# Altium PCB power.PcbDoc (part 1 of 2)
Units mm, origin at the board's own origin, x right, y up, seen from the top; angles counter-clockwise.
Board outline 100 x 100 mm, 2 copper layers (Top Layer, Bottom Layer); 57 components, 26 nets, 166 pads, 23 vias.
Unrouted connection lines stored in the file: 41.
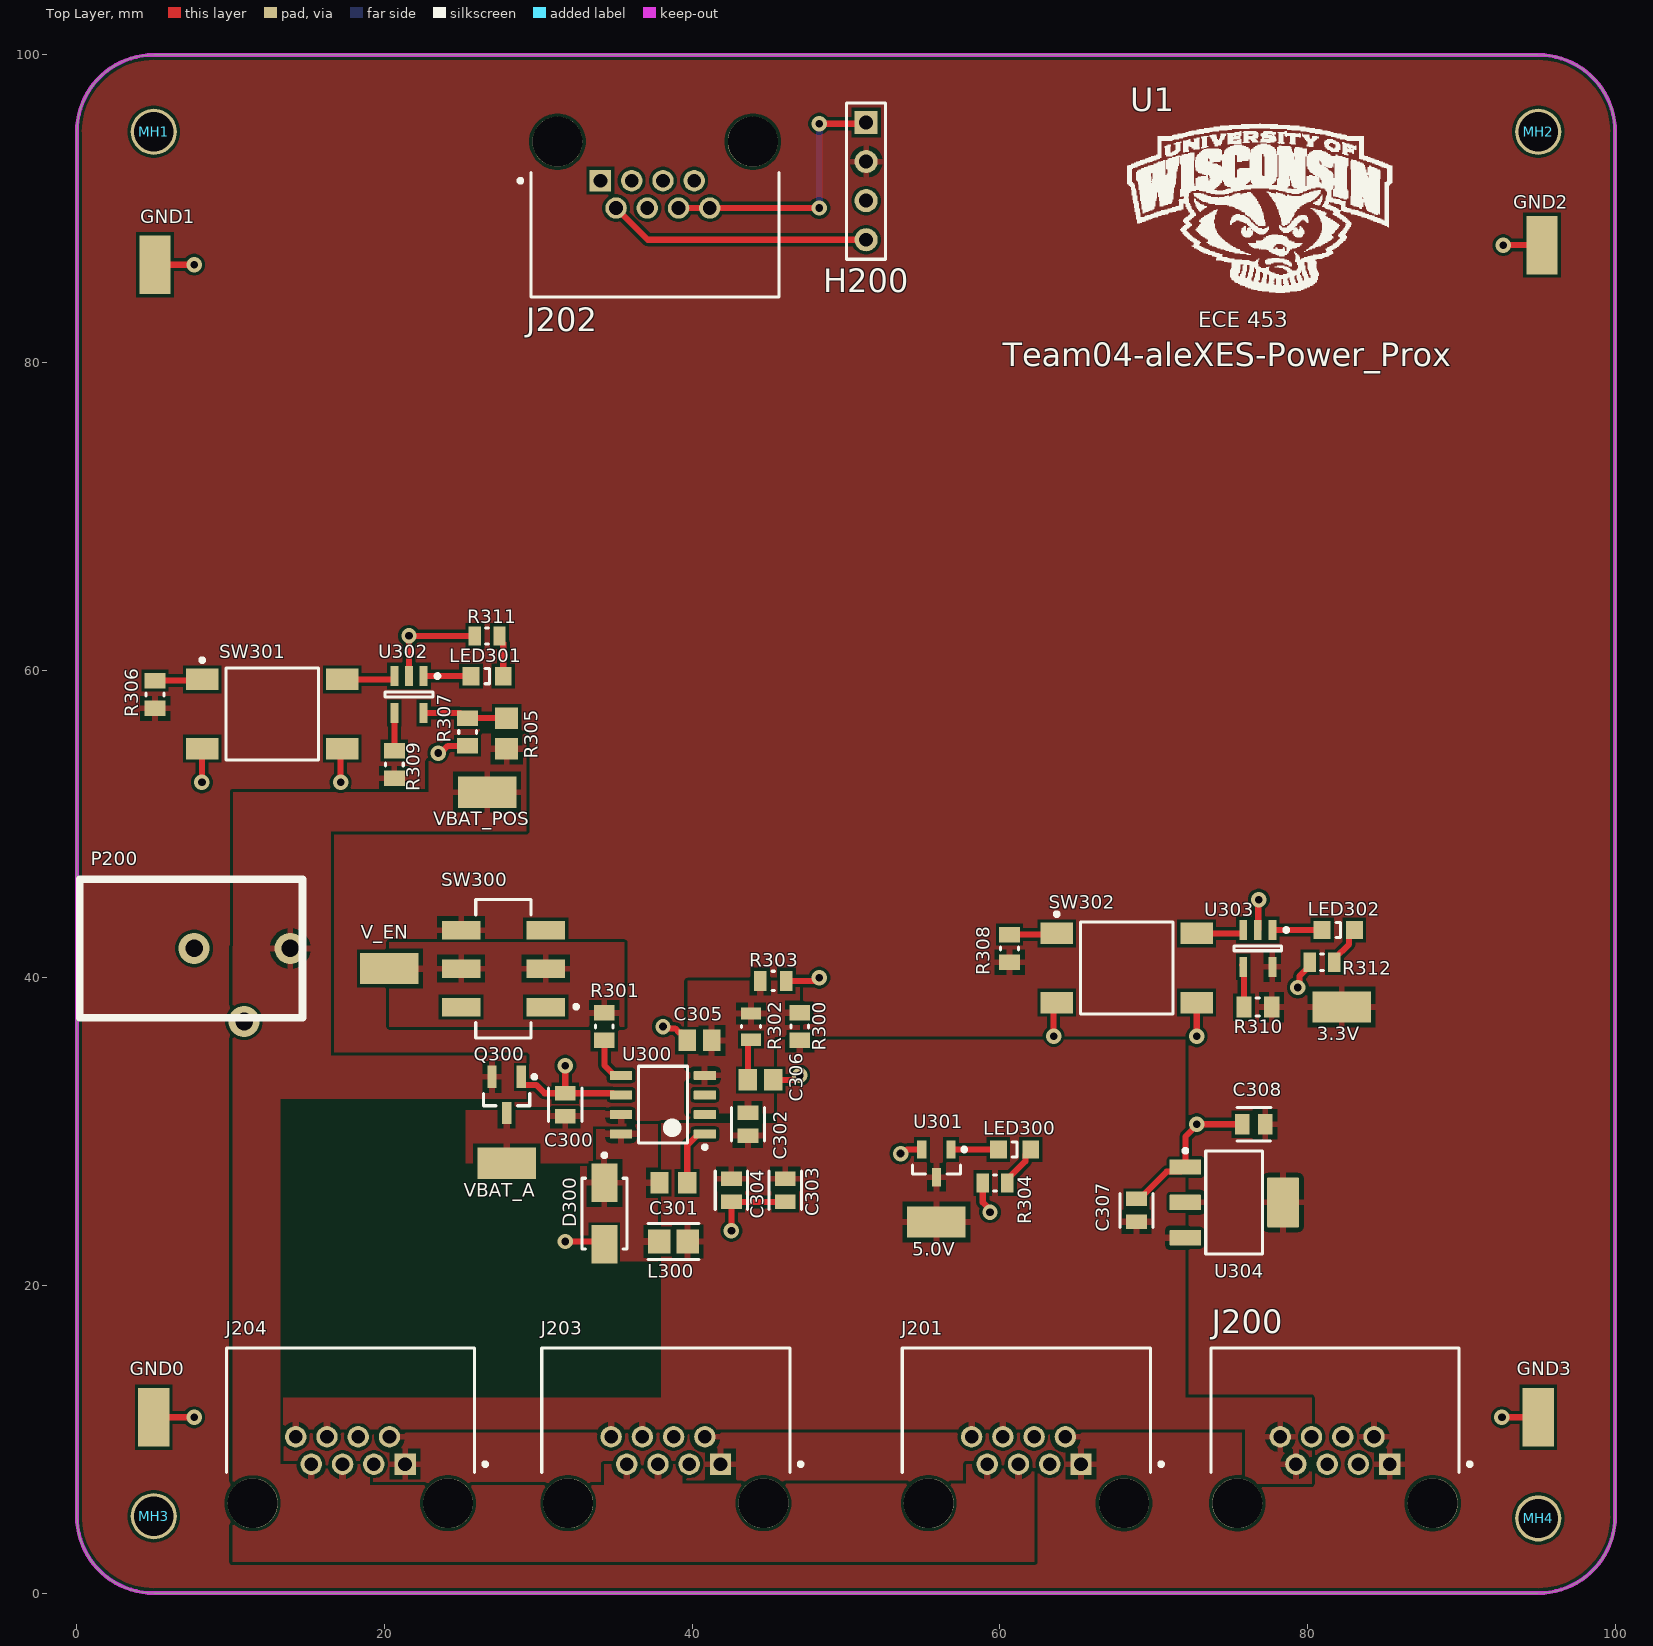
[diagram p0: Top Layer view]
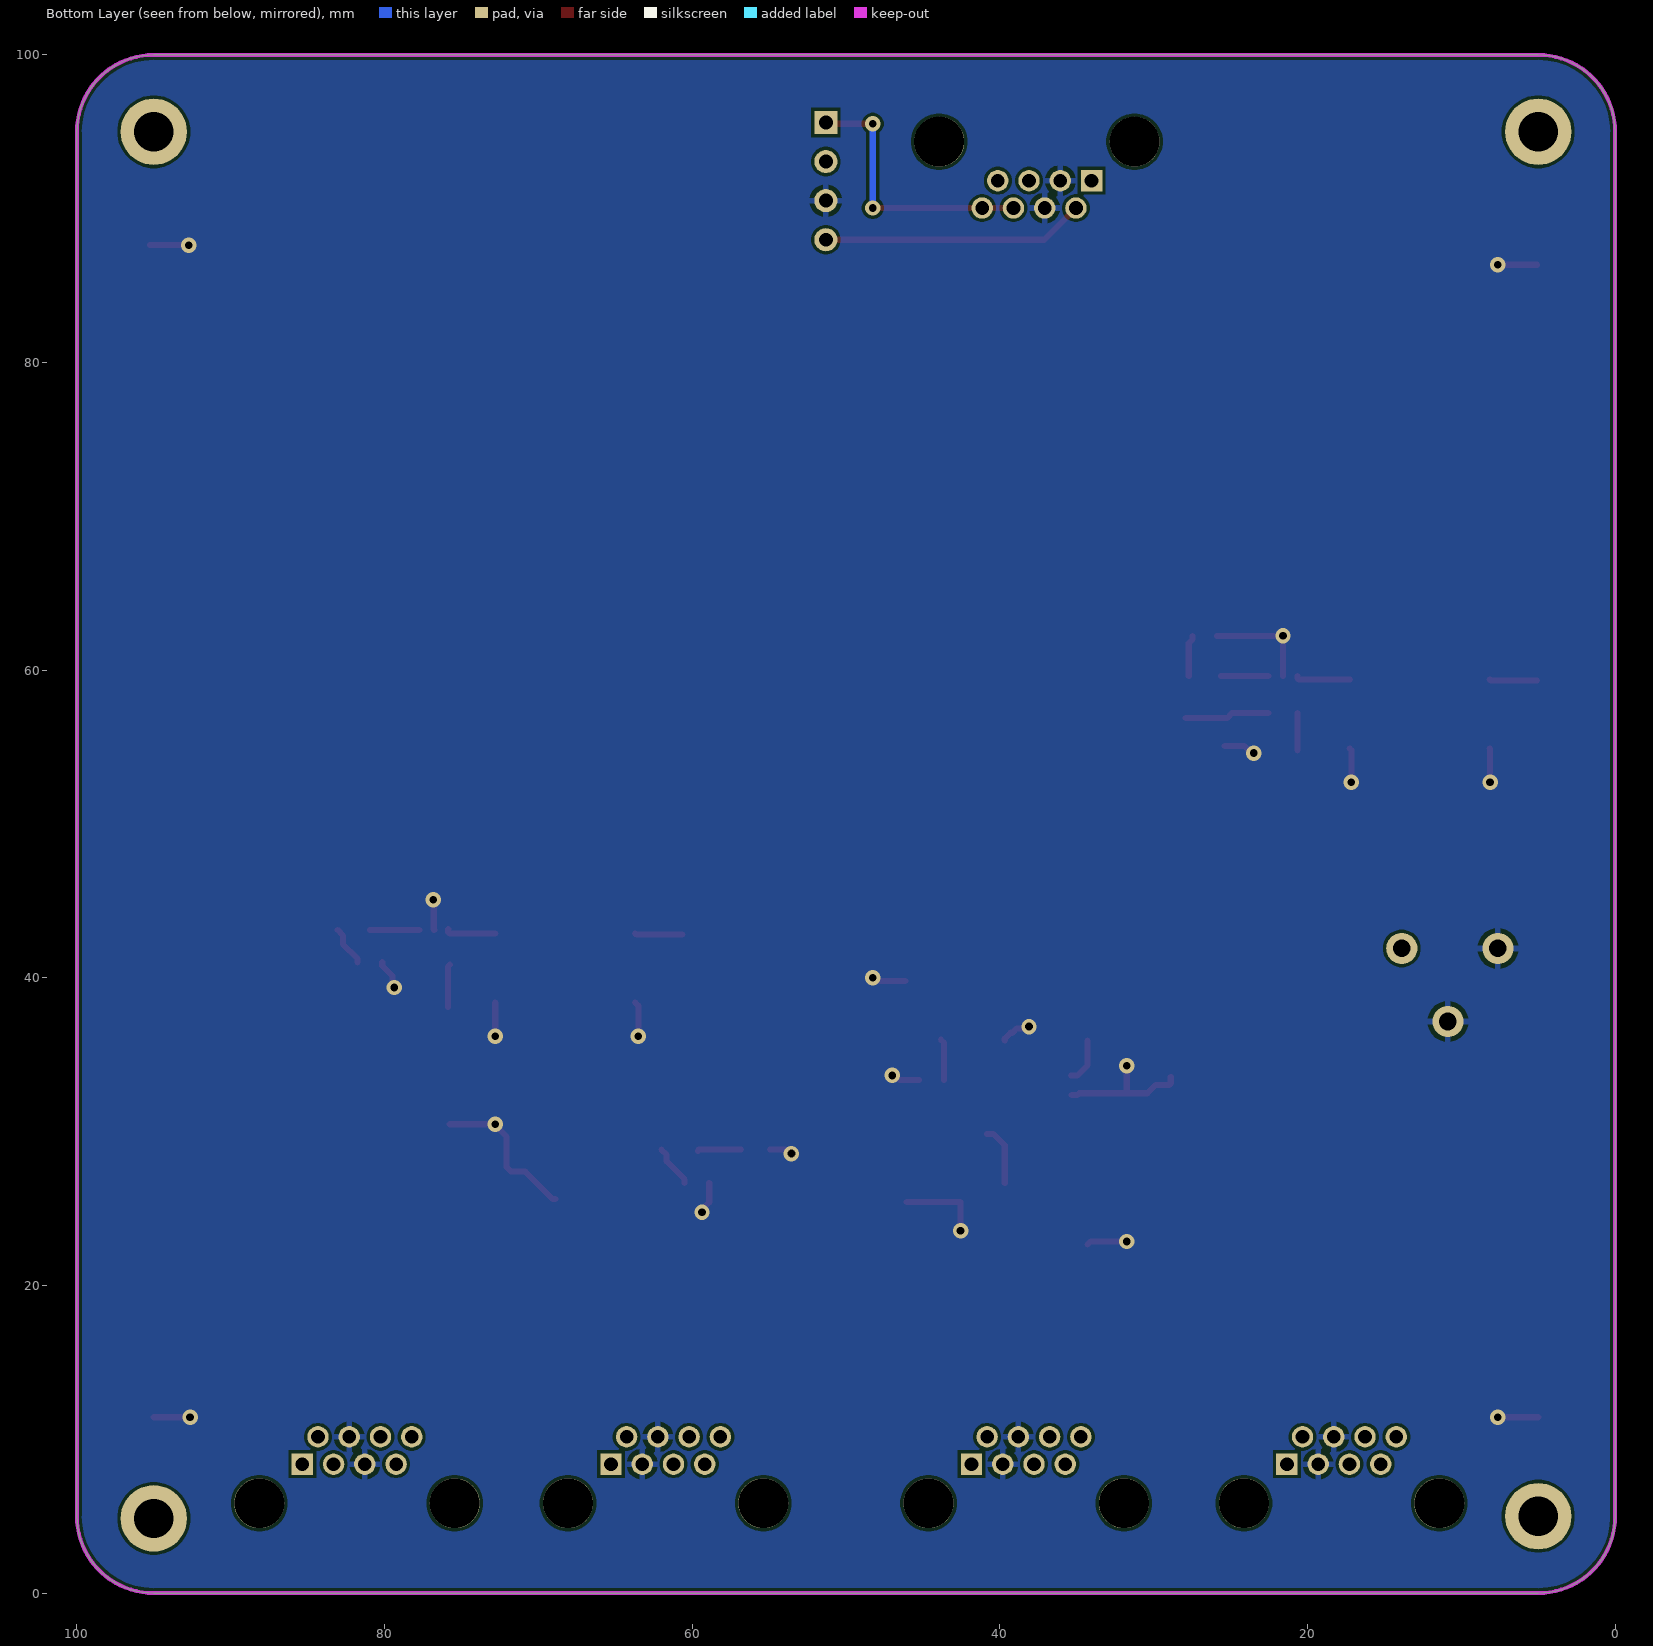
[diagram p1: Bottom Layer view, seen from below]
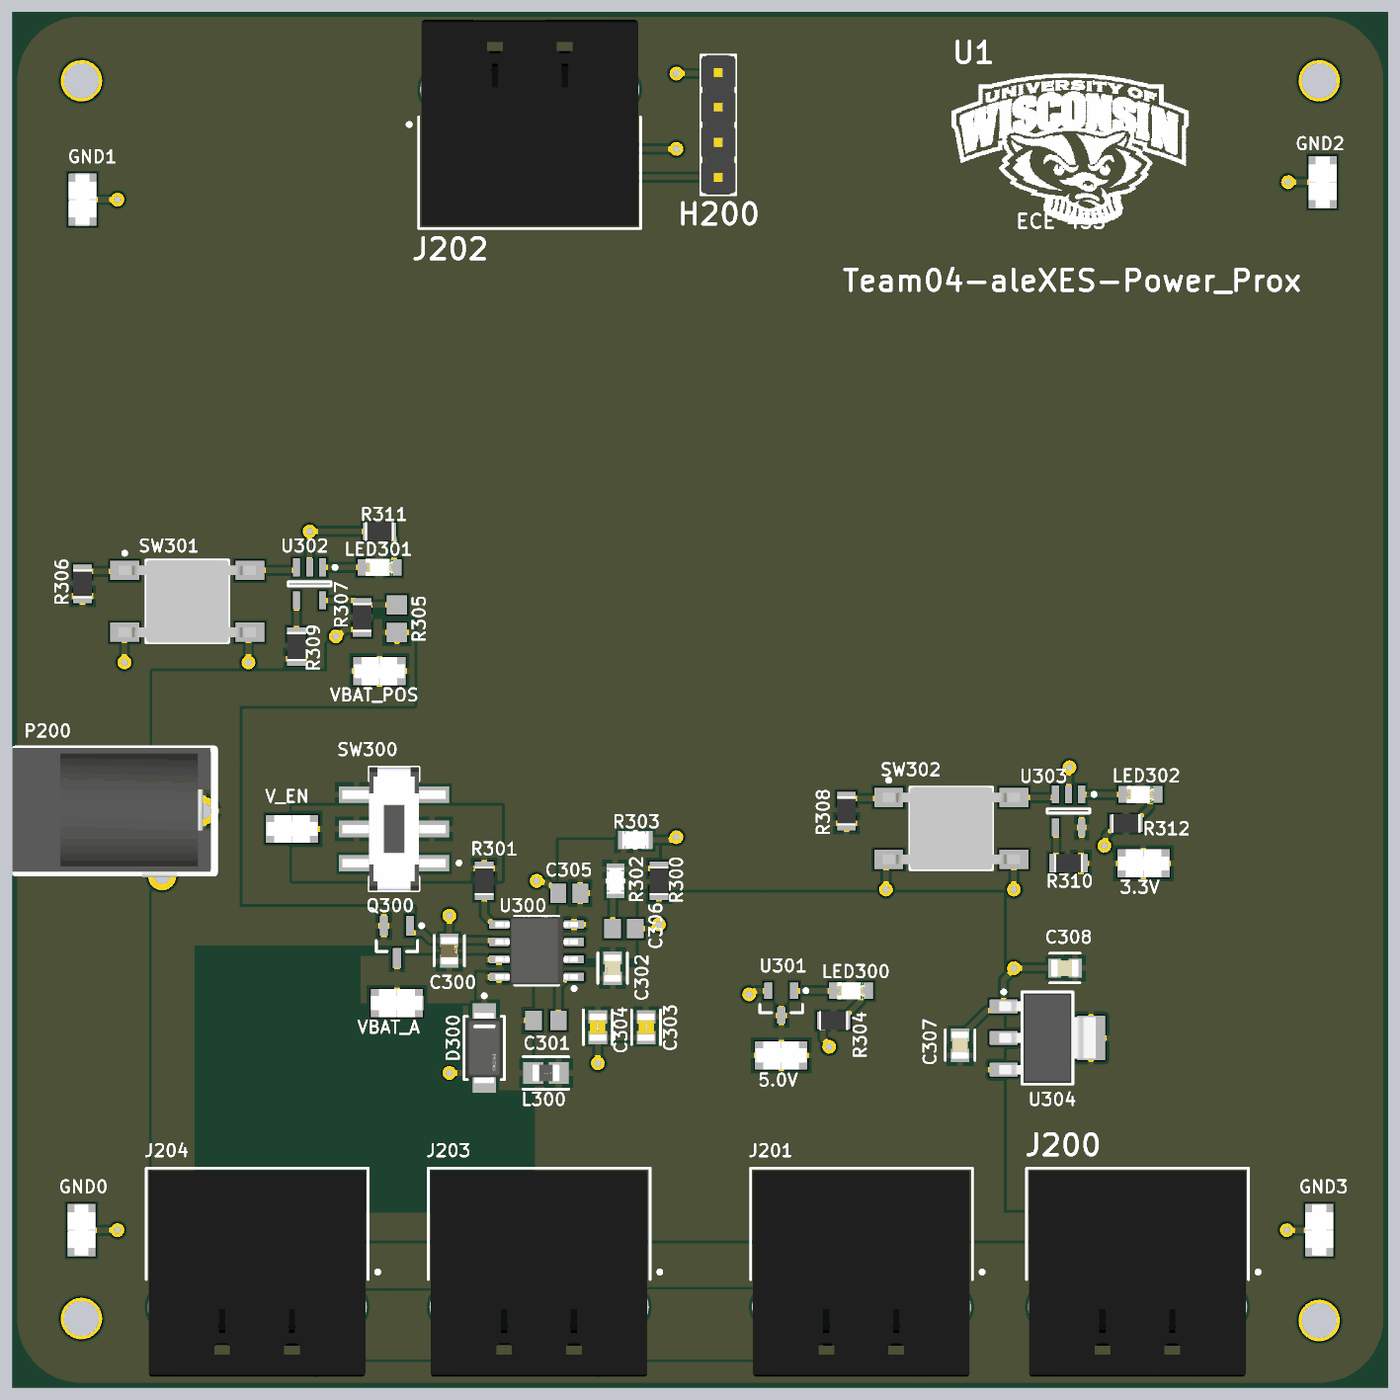
[diagram p2: 3D render of the assembled board from above, using the file's embedded part models]

## Layer stack, top to bottom
Top Solder: solder mask 0.0102, Solder Resist, Dk 3.5
Top Layer: signal copper 0.0356
Dielectric1: dielectric 0.32, FR-4, Dk 4.8
Bottom Layer: signal copper 0.0356
Bottom Solder: solder mask 0.0102, Solder Resist, Dk 3.5

## Board outline
0,5 ccw(c5,5) 5,0 95,0 ccw(c95,5) 100,5 100,95 ccw(c95,95) 95,100 5,100 ccw(c5,95) 0,95

## Design rules (kind name [scope] priority, off if disabled: settings)
Clearance Polygon_Clearance [All vs InPolygon] p1: gap=0.2 ignorepadtopadclearanceinfootprint=FALSE
Clearance [All] p2: gap=0.2 ignorepadtopadclearanceinfootprint=TRUE
ComponentClearance [InComponent('U3')] p1: gap=0 collisioncheckmode=3 verticalgap=0.254 showdistances=FALSE
Height [All] p1: minheight=0 maxheight=75 prefheight=12.7
HoleSize [All] p1: absolutevalues=TRUE maxlimit=6.35 minlimit=0.3 maxpercent=80.000 minpercent=20.000
MinimumAnnularRing [All] p1: minimumring=0.15
MinimumSolderMaskSliver [All] p1: minsoldermaskwidth=0.22
NetAntennae NetAntennae_5.0V [InNet('5.0V')] p1: netantennaetolerance=0
NetAntennae NetAntennae_3.3V [InNet('3.3V')] p2: netantennaetolerance=0
PlaneClearance [All] p1: clearance=0.3
PlaneConnect [All] p1: planeconnectstyle=Relief reliefexpansion=0.3 reliefentries=4 reliefconductorwidth=0.3 reliefairgap=0.3
PolygonConnect ViaConnect [All vs IsVia] p1: connectstyle=Direct reliefconductorwidth=0.381 reliefentries=4 polygonreliefangle="90 Angle" airgapwidth=0.254
PolygonConnect [All] p2: connectstyle=Relief reliefconductorwidth=0.4 reliefentries=4 polygonreliefangle="90 Angle" airgapwidth=0.3
RoutingVias [All] p1: holewidth=0.3 width=0.6 viastyle="Through Hole" minholewidth=0.3 minwidth=0.6 maxholewidth=5 maxwidth=10
SilkToSilkClearance [All] p1: silktosilkclearance=0
SilkToSolderMaskClearance [IsPad] p1: minsilkscreentomaskgap=0 clearancetoexposedcopper=TRUE
SolderMaskExpansion [All] p1: expansion=0.102 istentingtop=FALSE
UnConnectedPin [All] p1:
Width [All] p1: maxlimit=10 minlimit=0.2 preferedwidth=0.6
21 further rules are at their usual default settings.

## Classes and differential pairs
component class 04_Mechanical: MH1 MH2 MH3 MH4 U1

## Components (designator, comment, footprint, x,y, rotation, side; value= is the part's Value field where it differs from the comment)
3.3V "5019" KSTN-5019_V 82.22,38.1 r180 top
5.0V "5019" KSTN-5019_V 55.88,24.13 r180 top
C300 "C0805C475K3PACTU" FP-C0805C475K3PACTU-MFG 31.75,31.75 r90 top value=4.7uF
C301 "10nF" CAP_0805 38.775,26.67 r180 top
C302 "C0805C272K5RACTU" FP-C0805C-DN-MFG 43.625,30.48 r90 top value="2,700 pF"
C303 "C0805C476M9PACTU" FP-C0805C476M9PACTU-MFG 46.055,26.182 r270 top value=47uF
C304 "C0805C476M9PACTU" FP-C0805C476M9PACTU-MFG 42.55,26.182 r270 top value=47uF
C305 "C0805C151J1GACTU" CAPC2013X88X50NL20T25 40.475,35.93 r0 top value=150pF
C306 "08055C563KAT2A" CAPC2013X94X50NL20T25 44.45,33.36 r180 top value=56nF
C307 "C0805C106K8PACTU" FP-C0805C-DG-MFG 68.885,24.88 r90 top value=10uF
C308 "C0805C106K8PACTU" FP-C0805C-DG-MFG 76.505,30.48 r180 top value=10uF
D300 "B340A-13-F" FP-SMA-MFG 34.29,24.67 r270 top
GND0 "5019" KSTN-5019_V 5,11.43 r90 top
GND1 "5019" KSTN-5019_V 5.08,86.36 r90 top
GND2 "5019" KSTN-5019_V 95.25,87.63 r90 top
GND3 "5019" KSTN-5019_V 95,11.43 r90 top
H200 "4-Pin" 4X1HDR 51.308,91.793 r270 top value=4P-Header
J200 "RJHSE-5080" FP-RJHSE-5080-MFG 81.788,8.255 r0 top
J201 "RJHSE-5080" FP-RJHSE-5080-MFG 61.722,8.255 r0 top
J202 "RJHSE-5080" FP-RJHSE-5080-MFG 37.592,91.948 r180 top
J203 "RJHSE-5080" FP-RJHSE-5080-MFG 38.285,8.255 r0 top
J204 "RJHSE-5080" FP-RJHSE-5080-MFG 17.78,8.255 r0 top
L300 "LB2012T680K" FP-LB2012-1_25-0_2-IPC_A 38.775,22.86 r0 top
LED300 "150080GS75000" 0805_A 60.96,28.84 r180 top
LED301 "150080GS75000" 0805_A 26.67,59.62 r180 top
LED302 "150080GS75000" 0805_A 82,43.11 r180 top
MH1 "MHOLE_2_55MM" MHOLE_2_55MM 5,95 r0 top locked
MH2 "MHOLE_2_55MM" MHOLE_2_55MM 95,95 r0 top locked
MH3 "MHOLE_2_55MM" MHOLE_2_55MM 5,5 r0 top locked
MH4 "MHOLE_2_55MM" MHOLE_2_55MM 95,4.858 r0 top locked
P200 "PJ-102" PJ-102 13.87,41.91 r90 top value=CP-102AD
Q300 "SSM3J328R,LF" SOT-23_M 27.94,32.385 r270 top
R300 "RC0805FR-0710KL" RESC2013X60X35NL10T20 46.99,36.83 r90 top value=10kR
R301 "RC0805FR-0710KL" RESC2013X60X35NL10T20 34.29,36.83 r270 top value=10kR
R302 "CRCW08051K78FKEA" FP-CRCW0805-e3-IPC_C 43.825,36.83 r90 top value=1.78kR
R303 "CRCW08053K24FKEA" FP-CRCW0805-e3-IPC_C 45.275,39.8 r180 top value=3.24kR
R304 "RC0805FR-07330RL" RESC2013X60X35LL10T20 59.69,26.67 r0 top value=330R
R305 "30K" RES_0805 27.94,55.88 r270 top
R306 "RC0805FR-0710KL" RESC2013X60X35NL10T20 5.08,58.42 r270 top value=10kR
R307 "RC0805FR-0710KL" RESC2013X60X35NL10T20 25.4,55.98 r90 top value=10kR
R308 "RC0805FR-0710KL" RESC2013X60X35NL10T20 60.63,41.91 r270 top value=10kR
R309 "RC0805FR-0710KL" RESC2013X60X35NL10T20 20.64,53.87 r90 top value=10kR
R310 "RC0805FR-0710KL" RESC2013X60X35NL10T20 76.77,38.1 r180 top value=10kR
R311 "RC0805FR-07330RL" RESC2013X60X35LL10T20 26.67,62.23 r0 top value=330R
R312 "RC0805FR-07330RL" RESC2013X60X35LL10T20 80.95,41.01 r0 top value=330R
SW300 "JS202011SCQN" C&K_COMPONENTS_0_MFG 27.73,40.6 r90 top
SW301 "FSM4JSMA" TECO-FSM4JSMA_V 12.7,57.15 r90 top
SW302 "FSM4JSMA" TECO-FSM4JSMA_V 68.25,40.64 r90 top
U1 "Bucky" WALKINGBUCKY 75.692,82.804 r0 top
U300 "TPS5410D" D0008A_N 38.1,31.75 r180 top
U301 "MCP112T-475E/TT" SOT-23-TT3_L 55.88,27.94 r270 top
U302 "MCP1316T-29LE/OT" SOT-23-OT5_M 21.59,58.42 r270 top
U303 "MCP1316T-29LE/OT" SOT-23-OT5_M 76.77,41.91 r270 top
U304 "TLV1117LV33DCYT" DCY0004A_M 75.235,25.4 r0 top
V_EN "5019" KSTN-5019_V 20.32,40.6 r0 top
VBAT_A "5019" KSTN-5019_V 27.94,27.94 r180 top
VBAT_POS "5019" KSTN-5019_V 26.67,52.07 r180 top

## Footprints (in the part's own frame and the unit in brackets; to place one, negate y for a bottom-side part, rotate by r counter-clockwise, add the part's x,y. Pads: shape width x height; smd on the part's side, far side on the other; paste and mask are expansions set on the pad)
4X1HDR [mm]
  rect 1.5x1.5 hole 0.9: 1(-3.81,0)
  round 1.5 hole 0.9: 2(-1.27,0) 3(1.27,0) 4(3.81,0)
  silkscreen extent -5.08,-1.27 5.08,1.27, body extent -5.08,-1.27 5.08,1.27, height 8.55
0805_A [mm]
  rect 1.1x1.2 smd: 1(-1.05,0) 2(1.05,0)
  silkscreen extent -0.15,-0.5 0.15,0.5, body extent -1,-0.62 1,0.63, height 0.68
C&K_COMPONENTS_0_MFG [mm]
  rect 1.2x2.5 smd paste+0 mask+0: 1(-2.5,-2.75) 2(0,-2.75) 3(2.5,-2.75) 4(-2.5,2.75) 5(0,2.75) 6(2.5,2.75)
  silkscreen extent -4.5,-4.85 4.5,1.8, body extent -4.5,-3.75 4.5,3.75, height 5.51
CAP_0805 [mm]
  rect 1.2x1.4 smd: 1(-0.9,0) 2(0.9,0)
  body extent -1.07,-0.7 1.07,0.7, height 0.7
CAPC2013X88X50NL20T25 [mm] "Chip Capacitor, 2-Leads, Body 2.00x1.25mm, IPC Medium Density"
  rect 1.15x1.4 smd: 1(-0.8,0) 2(0.8,0)
  body extent -1.1,-0.72 1.1,0.72, height 0.88
CAPC2013X94X50NL20T25 [mm] "Chip Capacitor, 2-Leads, Body 2.01x1.25mm, IPC Medium Density"
  rect 1.2x1.4 smd: 1(-0.825,0) 2(0.825,0)
  body extent -1.1,-0.72 1.11,0.72, height 0.94
D0008A_N [mm] "SOIC, 8-Leads, Body 5x4mm, Pitch 1.27mm, IPC Medium Density"
  rrect17% 1.45x0.6 smd: 1(-2.725,1.905) 2(-2.725,0.635) 3(-2.725,-0.635) 4(-2.725,-1.905) 5(2.725,-1.905) 6(2.725,-0.635) 7(2.725,0.635) 8(2.725,1.905)
  silkscreen extent -2.85,-2.5 1.6,2.88, body extent -3,-2.45 3,2.45, height 1.63
DCY0004A_M [mm]
  rrect10% 2.05x1 smd: 1(-3.175,2.3) 2(-3.175,0) 3(-3.175,-2.3)
  rrect5% 2.05x3.25 smd: 4(3.175,0)
  silkscreen extent -3.3,-3.35 1.85,3.47, body extent -3.5,-3.25 3.5,3.25, height 1.62
FP-C0805C475K3PACTU-MFG [mm]
  rect 0.95x1.35 smd paste+0 mask+0: 1(-0.75,0) 2(0.75,0)
  silkscreen extent -1.1,-1.1 1.1,1.1, body extent -1.4,-0.85 1.4,0.85, height 0.25
FP-C0805C476M9PACTU-MFG [mm]
  rect 0.95x1.35 smd paste+0 mask+0: 1(-0.75,0) 2(0.75,0)
  silkscreen extent -1.25,-1.05 1.25,1.05, body extent -1.4,-0.85 1.4,0.85, height 0.25
FP-C0805C-DG-MFG [mm]
  rect 0.95x1.35 smd paste+0 mask+0: 1(-0.75,0) 2(0.75,0)
  silkscreen extent -1.11,-1.08 1.1,1.07, body extent -1.4,-0.85 1.4,0.85, height 0.25
FP-C0805C-DN-MFG [mm]
  rect 0.95x1.35 smd paste+0 mask+0: 1(-0.75,0) 2(0.75,0)
  silkscreen extent -1.1,-1.07 1.1,1.07, body extent -1.4,-0.85 1.4,0.85, height 0.25
FP-CRCW0805-e3-IPC_C [mil]
  rect 31.75x51.5 smd paste+0 mask+0: 1(-33.5,0) 2(33.5,0)
  silkscreen extent -3,-25 3,25, body extent -53,-31 53,31, height 10
FP-LB2012-1_25-0_2-IPC_A [mm]
  rect 1.455x1.556 smd paste+0 mask+0: 1(-0.926,0) 2(0.926,0)
  silkscreen extent -1.65,-1.18 1.65,1.18, body extent -2.15,-1.28 2.15,1.28, height 0.25
FP-RJHSE-5080-MFG [mm]
  rect 1.39x1.39 hole 0.89 paste-1000 mask+0: 1(3.556,0.127)
  round 1.39 hole 0.89 paste-1000 mask+0: 2(2.54,1.905) 3(1.524,0.127) 4(0.508,1.905) 5(-0.508,0.127) 6(-1.524,1.905) 7(-2.54,0.127) 8(-3.556,1.905)
  round 3.25 hole 3.25 unplated paste-1000 mask+0: ""(-6.35,-2.413) ""(6.35,-2.413)
  silkscreen extent -8.06,-0.41 8.89,7.68, body extent -8.16,-7.78 8.16,7.78, height 0.25
FP-SMA-MFG [mm]
  rect 2.5x1.7 smd paste+0 mask+0: 1(-2,0) 2(2,0)
  silkscreen extent -3.92,-1.46 2.3,1.46, body extent -3.35,-1.56 3.35,1.56, height 0.25
KSTN-5019_V [mm]
  rect 3.8x2.03 smd: 1(0,0)
  body extent -1.9,-1.01 1.9,1.02, height 2.29
MHOLE_2_55MM [mm]
  round 3 / inner round 4.572 / far side round 4.318 hole 2.55: 1(0,0)
PJ-102 [mil]
  round 80 hole 45: 1(0,0) 2(0,246.05) 3(-187,118.1)
  silkscreen extent -177,-31 177,539, body extent -190,-20 180,547, height 435
RES_0805 [mm]
  rect 1.4x1.5 smd: 1(-1,0) 2(1,0)
  body extent -1.07,-0.7 1.07,0.7, height 0.7
RESC2013X60X35LL10T20 [mm]
  rect 0.8x1.25 smd: 1(-0.8,0) 2(0.8,0)
  silkscreen extent -0.1,-0.53 0.1,0.53, body extent -1.05,-0.67 1.05,0.68, height 0.6
RESC2013X60X35NL10T20 [mm]
  rect 1x1.35 smd: 1(-0.9,0) 2(0.9,0)
  silkscreen extent -0.1,-0.58 0.1,0.58, body extent -1.05,-0.68 1.05,0.67, height 0.6
SOT-23-OT5_M [mm]
  rect 1.3x0.508 smd: 1(-1.2,0.95) 2(-1.2,0) 3(-1.2,-0.95) 4(1.2,-0.95) 5(1.2,0.95)
  silkscreen extent -1.32,-1.55 0.15,1.98, body extent -0.9,-1.55 0.9,1.55, height 1.45
SOT-23-TT3_L [mm] "SOT23, 3-Leads, Body 2.9x1.3mm, Pitch 0.95mm, Lead Span 2.4mm, IPC High Density"
  rect 1.2x0.6 smd: 1(-0.9,0.95) 2(-0.9,-0.95) 3(0.9,0)
  silkscreen extent -1.02,-1.55 0.7,1.93, body extent -0.7,-1.52 0.7,1.53, height 1.12
SOT-23_M [mm]
  rect 1.45x0.6 smd: 1(-1.175,0.95) 2(-1.175,-0.95) 3(1.175,0)
  silkscreen extent -1.3,-1.5 0.7,1.93, body extent -0.7,-1.5 0.7,1.5, height 1.1
TECO-FSM4JSMA_V [mm]
  rect 1.4x2.1 smd: 1(2.25,4.55) 2(2.25,-4.55) 3(-2.25,4.55) 4(-2.25,-4.55)
  silkscreen extent -3,-3 3.62,4.67, body extent -3,-5 3,5, height 5.08
WALKINGBUCKY [mm]
  silkscreen extent -7.42,1.75 9.8,12.73

## Part data
3.3V 5.0V GND0 GND1 GND2 GND3 V_EN VBAT_A VBAT_POS: library part CMP-1672-00008-1, "Test Point, 1 Position SMD, RoHS, Tape and Reel", Manufacturer="Keystone Electronics", Package Quantity=1, Supplier Part Number=59Y8500, Body Material=Bronze, Category=Connectors, ComponentLink1Description=https://datasheet.ciiva.com/14848/m60-2p61-14848437.pdf?src-supplier=Digi-Key, ComponentLink1URL=https://datasheet.ciiva.com/14848/m60-2p61-14848437.pdf?src-supplier=Digi-Key, ComponentLink2Description=https://datasheet.ciiva.com/14848/m60-2p61-14848438.pdf?src-supplier=Digi-Key, ComponentLink2URL=https://datasheet.ciiva.com/14848/m60-2p61-14848438.pdf?src-supplier=Digi-Key, ComponentLink3Description=https://datasheet.ciiva.com/14848/m60-2p61-14848439.pdf?src-supplier=Digi-Key, ComponentLink3URL=https://datasheet.ciiva.com/14848/m60-2p61-14848439.pdf?src-supplier=Digi-Key, ComponentLink4Description=https://datasheet.ciiva.com/16318/m60-2p61-16318395.pdf?src-supplier=Future+Electronics, ComponentLink4URL=https://datasheet.ciiva.com/16318/m60-2p61-16318395.pdf?src-supplier=Future+Electronics, ComponentLink5Description=https://datasheet.ciiva.com/16885/70182998-16885945.pdf?src-supplier=Allied+Electronics, ComponentLink5URL=https://datasheet.ciiva.com/16885/70182998-16885945.pdf?src-supplier=Allied+Electronics, Contact Material=Bronze, Contact Plating=Silver, Height=0.09inch, Lead Free="Lead Free", Manufacturer Part Number=5019, Material=Bronze, Mounting Technology="Surface Mount,PCB", Packaging="Tape and Reel", Pins=1, Plating=Silver, Pricing="1=0.411, 10=0.389, 25=0.285, 50=0.279, 100=0.273, 250=0.246 (USD)", Reach SVHC Compliant=No, RoHS=Yes, RoHS Compliant=Yes, Series=5019, Stock=11269, Supplier=Newark, Termination=SMD/SMT
C300: library part CMP-2007-01010-2, "CAP CER 4.7UF 25V X5R 0805", Capacitance=4.7uF, Capacitor Type=Ceramic, Case Code (Imperial)=0805, Case Code (Metric)=2012, Dielectric=X5R, Manufacturer=KEMET, Max Operating Temperature=85°C, Min Operating Temperature=-55°C, Package Quantity=2500, Package Shape=Rectangular, Package Style=SMTMeter, Rated DC Voltage (URdc)=25V, Supplier Part Number=399-C0805C475K3PAC7800CT-ND, Tolerance=10%, Case/Package=0805, Category="Ceramic Capacitors", ComponentLink1Description=https://datasheet.ciiva.com:443/pdfs/VipMasterIC/IC/KEME/KEME-S-A0008991665/KEME-S-A0008991665-1.pdf?src-supplier=IHS+Markit, ComponentLink1URL=https://datasheet.ciiva.com:443/pdfs/VipMasterIC/IC/KEME/KEME-S-A0008991665/KEME-S-A0008991665-1.pdf?src-supplier=IHS+Markit, ComponentLink2Description=https://datasheet.ciiva.com/7842/40889-7842614.pdf?src-supplier=Element14, ComponentLink2URL=https://datasheet.ciiva.com/7842/40889-7842614.pdf?src-supplier=Element14, ComponentLink3Description=https://datasheet.ciiva.com/22748/1918694-22748309.pdf?src-supplier=Element14, ComponentLink3URL=https://datasheet.ciiva.com/22748/1918694-22748309.pdf?src-supplier=Element14, Construction=Flat, Contact Plating=Tin, Depth=1.25mm, Dielectric Material=Ceramic, Dissipation Factor=5%, Height=1.25mm, JESD-609 Code=e3, Lead Free="Lead Free", Length=2mm, Manufacturer Part Number=C0805C475K3PACTU, Mount=PCB, Mounting Technology="Surface Mount", Multilayer=Yes, Number of Pins=2, Packaging="Tape and Reel", Pins=2, Pricing="1=0.29, 10=0.198, 50=0.1388, 100=0.1189, 500=0.0892, 1000=0.07533 (USD)", Radiation Hardening=No, REACH SVHC="No SVHC", Reach SVHC Compliant=Yes, RoHS=Yes, RoHS Compliant=Yes, Series=C0805C, Stock=419470, Supplier=Digi-Key, Temperature Characteristics Code=X5R, Terminal Finish=Nickel, Termination=SMD/SMT, Tolerance  (fill in as +-)=10%, Tolerance (fill in as +-)=10%, Voltage=25V, Voltage Rating (DC)=25V, Width=1.2mm
C301: library part Cap_4, "Cap Ceramic 0.01uF 100V X7R 10% SMD 0805 125°C Plastic T/R", Case Code (Imperial)=0805, Case Code (Metric)=2012, Dielectric=X7R, Dielectric Material=Ceramic, Manufacturer=KEMET, Manufacturer Part Number=C0805C103K1RAC7210, Max Operating Temperature=125°C, Min Operating Temperature=-55°C, Package Quantity=10000, Supplier Part Number 1=399-17617-1-ND, Tolerance=10%, Voltage Rating=100V, Case/Package=0805, Category="Ceramic Capacitors", ComponentLink1Description=http://www.farnell.com/datasheets/2747800.pdf?src-supplier=Farnell, ComponentLink1URL=http://www.farnell.com/datasheets/2747800.pdf?src-supplier=Farnell, ComponentLink2Description=http://www.mouser.com/ds/2/212/KEM_C1002_X7R_SMD-1102033.pdf?src-supplier=Mouser, ComponentLink2URL=http://www.mouser.com/ds/2/212/KEM_C1002_X7R_SMD-1102033.pdf?src-supplier=Mouser, ComponentLink3Description=http://components.arrow.com/part/dataview/2091052S6675795N7429?src-supplier=Arrow+Electronics, ComponentLink3URL=http://components.arrow.com/part/dataview/2091052S6675795N7429?src-supplier=Arrow+Electronics, ComponentLink4Description=https://www.verical.com/server-webapp/html/getDatasheet?partID=131027&src-supplier=Verical, ComponentLink4URL=https://www.verical.com/server-webapp/html/getDatasheet?partID=131027&src-supplier=Verical, ComponentLink5Description=http://www.kemet.com/kemet/web/homepage/kechome.nsf/weben/C4DA2DA1D1C9D3C3CA2570A50016092D/$file/KEM_C1002_X7R_SMD.pdf?src-supplier=Avnet, ComponentLink5URL=http://www.kemet.com/kemet/web/homepage/kechome.nsf/weben/C4DA2DA1D1C9D3C3CA2570A50016092D/$file/KEM_C1002_X7R_SMD.pdf?src-supplier=Avnet, ComponentLink6Description=https://api.kemet.com/component-edge/download/datasheet/C0805C103K1RAC7210.pdf?src-supplier=Digi-Key, ComponentLink6URL=https://api.kemet.com/component-edge/download/datasheet/C0805C103K1RAC7210.pdf?src-supplier=Digi-Key, ComponentLink7Description=http://www.farnell.com/datasheets/2747800.pdf?src-supplier=Newark, ComponentLink7URL=http://www.farnell.com/datasheets/2747800.pdf?src-supplier=Newark, ComponentLink8Description=http://www.kemet.com/kemet/web/homepage/kechome.nsf/weben/C4DA2DA1D1C9D3C3CA2570A50016092D/$file/KEM_C1002_X7R_SMD.pdf, ComponentLink8URL=http://www.kemet.com/kemet/web/homepage/kechome.nsf/weben/C4DA2DA1D1C9D3C3CA2570A50016092D/$file/KEM_C1002_X7R_SMD.pdf, Construction=Flat, Depth=1.25mm, Height=0.78mm, Length=2mm, Mounting Technology="Surface Mount", Packaging="Tape and Reel", Pricing 1="1=0.10000, 10=0.05400, 50=0.02960, 100=0.02430, 500=0.01732, 1000=0.01361, 2500=0.01237, 5000=0.01138 (USD)", Radiation Hardening=No, RoHS=Yes, RoHS Compliant=Yes, Series=C0805C, Stock 1=464939, Supplier 1=Digi-Key, Termination=SMD/SMT, Voltage Rating (DC)=100V
C302: library part CMP-2007-00354-2, "0805 C 2.7nF Ceramic Multilayer Capacitor; 50 VDC; +125degC; X7R Dielec; +/-10%", Capacitance="2,700 pF", Capacitor Type=Ceramic, Case/Package=0805, Manufacturer=KEMET, Max Operating Temperature=125°C, Min Operating Temperature=-55°C, Package=C0805C-DN, Package Shape=Rectangular, Rated DC Voltage (URdc)=50V, Supplier Part Number=399-C0805C272K5RAC7800CT-ND, Temperature="-55°C to +125°C", Temperature Characteristic=X7R, Temperature Coefficient=30ppm/°C, Temperature Range High=+125°C, Tolerance=0.1, Tolerance  (fill in as +-)=10%, Voltage Rating="50 V", Automotive=No, Category=Cap, ComponentLink1Description=http://capacitoredge.kemet.com:80/capedge2/DataSheet/Datasheet-C0805C272K5RAC7800.pdf?pn=C0805C272K5RAC7800&src-supplier=IHS+Markit, ComponentLink1URL=http://capacitoredge.kemet.com:80/capedge2/DataSheet/Datasheet-C0805C272K5RAC7800.pdf?pn=C0805C272K5RAC7800&src-supplier=IHS+Markit, ComponentLink2Description=Datasheet, ComponentLink2URL=https://content.kemet.com/datasheets/KEM_C1003_C0G_SMD.pdf, ComponentLink3Description=https://datasheet.ciiva.com/14589/70095383-14589404.pdf?src-supplier=Allied+Electronics, ComponentLink3URL=https://datasheet.ciiva.com/14589/70095383-14589404.pdf?src-supplier=Allied+Electronics, Device Class L1="Passive Components", Device Class L2=Capacitors, Device Class L3="Ceramic Capacitors", Dielectric Material=Ceramic, Digikey Description="0805 C 2.7nF Ceramic Multilayer Capacitor; 50 VDC; +125degC; X7R Dielec; +/-10%", Height=0.88mm, Ipc Land Pattern Name=CAPC200125X78, JESD-609 Code=e3, Lead Free=Yes, Manufacturer Part Number=C0805C272K5RACTU, Manufacturer Series=C0805C272K5RACTU, Material=Ceramic, Mounting Technology="Surface Mount", Mouser Description="0805 C 2.7nF Ceramic Multilayer Capacitor; 50 VDC; +125degC; X7R Dielec; +/-10%", Multilayer=Yes, Octopart=https://octopart.com/c0805c272k5ractu-kemet-135930, Packaging="Tape and Reel", Pins=2, Pricing="1=0.16, 10=0.108, 50=0.0648, 100=0.0547, 500=0.03744, 1000=0.03312 (USD)", Reach SVHC Compliant=Yes, RoHS=TRUE, RoHS Compliant=Yes, Stock=22544, Supplier=Digi-Key, Temperature Characteristics Code=X7R, Temperature Range Low=-55°C, Terminal Finish=Nickel, Termination=Wraparound, Tolerance (fill in as +-)=10%
C303 C304: library part CMP-2007-01008-2, "CAP CER 47UF 6.3V X5R 0805", Capacitance=47uF, Capacitor Type=Ceramic, Case Code (Imperial)=0805, Case Code (Metric)=2012, Dielectric=X5R, Manufacturer=KEMET, Max Operating Temperature=85°C, Min Operating Temperature=-55°C, Package Quantity=3000, Package Shape=Rectangular, Package Style=SMTMeter, Rated DC Voltage (URdc)=6.3V, Supplier Part Number=399-C0805C476M9PAC7800CT-ND, Tolerance=20%, Case/Package=0805, Category="Ceramic Capacitors", ComponentLink1Description=https://datasheet.ciiva.com:443/pdfs/VipMasterIC/IC/KEME/KEME-S-A0008991665/KEME-S-A0008991665-1.pdf?src-supplier=IHS+Markit, ComponentLink1URL=https://datasheet.ciiva.com:443/pdfs/VipMasterIC/IC/KEME/KEME-S-A0008991665/KEME-S-A0008991665-1.pdf?src-supplier=IHS+Markit, ComponentLink2Description=https://datasheet.ciiva.com/6137/40889-6137142.pdf?src-supplier=Farnell, ComponentLink2URL=https://datasheet.ciiva.com/6137/40889-6137142.pdf?src-supplier=Farnell, ComponentLink3Description=https://datasheet.ciiva.com/7842/40889-7842618.pdf?src-supplier=Element14, ComponentLink3URL=https://datasheet.ciiva.com/7842/40889-7842618.pdf?src-supplier=Element14, Construction=Flat, Depth=1.25mm, Dielectric Material=Ceramic, Dissipation Factor=5%, Height=1.25mm, JESD-609 Code=e3, Length=2mm, Manufacturer Part Number=C0805C476M9PACTU, Mount=PCB, Mounting Technology="Surface Mount", Multilayer=Yes, Number of Pins=2, Packaging="Tape and Reel", Pins=2, Pricing="1=0.78, 10=0.597, 50=0.4956, 100=0.4268, 500=0.3304, 1000=0.28451 (USD)", Radiation Hardening=No, REACH SVHC="No SVHC", Reach SVHC Compliant=Yes, RoHS=Yes, RoHS Compliant=Yes, Series=C0805C, Stock=80632, Supplier=Digi-Key, Temperature Characteristics Code=X5R, Terminal Finish=Nickel, Termination=SMD/SMT, Tolerance  (fill in as +-)=20%, Tolerance (fill in as +-)=20%, Voltage=6.3V, Voltage Rating=6.3V, Voltage Rating (DC)=6.3V, Width=1.2mm
C305: library part CMP-2007-00291-1, Capacitor Type=Ceramic, Case/Package=0805, Manufacturer=Kemet, Max Operating Temperature=125°C, Min Operating Temperature=-55°C, Package Shape=Rectangular, Rated DC Voltage (URdc)=100V, Supplier Part Number=399-C0805C151J1GAC7800CT-ND, Temperature Characteristics Code=C0G, Tolerance  (fill in as +-)=5%, Category="Ceramic Capacitors", ComponentLink1Description=https://datasheet.ciiva.com:443/pdfs/VipMasterIC/IC/KEME/KEME-S-A0000339992/KEME-S-A0000339992-1.pdf?src-supplier=IHS+Markit, ComponentLink1URL=https://datasheet.ciiva.com:443/pdfs/VipMasterIC/IC/KEME/KEME-S-A0000339992/KEME-S-A0000339992-1.pdf?src-supplier=IHS+Markit, ComponentLink2Description=https://datasheet.ciiva.com/22752/1907778-22752185.pdf?src-supplier=Element14, ComponentLink2URL=https://datasheet.ciiva.com/22752/1907778-22752185.pdf?src-supplier=Element14, ComponentLink3Description=https://datasheet.ciiva.com/18193/getdatasheetpartid-330695-18193563.pdf?src-supplier=Verical, ComponentLink3URL=https://datasheet.ciiva.com/18193/getdatasheetpartid-330695-18193563.pdf?src-supplier=Verical, Dielectric Material=Ceramic, JESD-609 Code=e3, Manufacturer Part Number=C0805C151J1GACTU, Manufacturer Series=C0805C151J1GACTU, Mounting Technology="Surface Mount", Multilayer=Yes, Packaging="Tape and Reel", Part Number=C0805C151J1GACTU, Pins=2, Pricing="1=0.26, 10=0.18, 50=0.1202, 100=0.1022, 500=0.07212, 1000=0.0631 (USD)", Reach SVHC Compliant=Yes, RoHS=Yes, RoHS Compliant=Yes, Stock=29603, Supplier=Digi-Key, Terminal Finish=Nickel, Termination=Wraparound, Tolerance (fill in as +-)=5%
C306: library part CMP-2007-04436-1, Capacitor Type=Ceramic, Case/Package=0805, Manufacturer="AVX Interconnect / Elco", Max Operating Temperature=125°C, Min Operating Temperature=-55°C, Package Shape=Rectangular, Package Style=SMTMeter, Rated DC Voltage (URdc)=50V, Supplier Part Number=478-1392-1-ND, Temperature Characteristics Code=X7R, Tolerance  (fill in as +-)=10%, Category="Ceramic Capacitors", ComponentLink1Description=https://datasheet.ciiva.com:443/pdfs/VipMasterIC/IC/AVXC/AVXC-S-A0008668650/AVXC-S-A0008668650-1.pdf?src-supplier=IHS+Markit, ComponentLink1URL=https://datasheet.ciiva.com:443/pdfs/VipMasterIC/IC/AVXC/AVXC-S-A0008668650/AVXC-S-A0008668650-1.pdf?src-supplier=IHS+Markit, ComponentLink2Description=https://datasheet.ciiva.com/19476/1036591-19476553.pdf?src-supplier=Jameco, ComponentLink2URL=https://datasheet.ciiva.com/19476/1036591-19476553.pdf?src-supplier=Jameco, ComponentLink3Description=https://datasheet.ciiva.com/11787/0900766b80dc2409-11787766.pdf?src-supplier=Rs, ComponentLink3URL=https://datasheet.ciiva.com/11787/0900766b80dc2409-11787766.pdf?src-supplier=Rs, ComponentLink4Description=https://datasheet.ciiva.com/150/cx7r-150632.pdf?src-supplier=Digi-Key, ComponentLink4URL=https://datasheet.ciiva.com/150/cx7r-150632.pdf?src-supplier=Digi-Key, ComponentLink5Description=https://datasheet.ciiva.com/150/cx7r-150633.pdf?src-supplier=Digi-Key, ComponentLink5URL=https://datasheet.ciiva.com/150/cx7r-150633.pdf?src-supplier=Digi-Key, ComponentLink6Description=https://datasheet.ciiva.com/150/cx7r-150634.pdf?src-supplier=Digi-Key, ComponentLink6URL=https://datasheet.ciiva.com/150/cx7r-150634.pdf?src-supplier=Digi-Key, ComponentLink7Description=https://datasheet.ciiva.com/5412/cx7r-5412810.pdf?src-supplier=Mouser, ComponentLink7URL=https://datasheet.ciiva.com/5412/cx7r-5412810.pdf?src-supplier=Mouser, ComponentLink8Description=https://datasheet.ciiva.com/16326/cx7r-16326391.pdf?src-supplier=Future+Electronics, ComponentLink8URL=https://datasheet.ciiva.com/16326/cx7r-16326391.pdf?src-supplier=Future+Electronics, ComponentLink9Description=https://datasheet.ciiva.com/28535/1818074-28535102.pdf?src-supplier=Element14, ComponentLink9URL=https://datasheet.ciiva.com/28535/1818074-28535102.pdf?src-supplier=Element14, Dielectric Material=Ceramic, Height=0.94mm, JESD-609 Code=e3, Length=2.01mm, Manufacturer Part Number=08055C563KAT2A, Mounting Technology="Surface Mount", Multilayer=Yes, Packaging="Tape and Reel", Part Number=08055C563KAT2A, Pins=2, Pricing="1=0.12, 10=0.089, 50=0.0504, 100=0.0418, 500=0.02928, 1000=0.02424 (USD)", Reach SVHC Compliant=Yes, RoHS=Yes, RoHS Compliant=Yes, Stock=29440, Supplier=Digi-Key, Terminal Finish=Nickel, Termination=Wraparound, Tolerance (fill in as +-)=10%, Width=1.25mm
C307 C308: library part CMP-2007-03243-2, "CAP CER 10UF 10V X5R 0805", Case Code (Imperial)=0805, Case Code (Metric)=2012, Dielectric=X5R, Dielectric Material=Ceramic, Manufacturer=KEMET, Max Operating Temperature=85°C, Min Operating Temperature=-55°C, Package Quantity=1, Supplier Part Number=70K9138, Tolerance=10%, Voltage=10V, Case/Package=0805, Category="Ceramic Capacitors", ComponentLink1Description=https://datasheet.ciiva.com/7842/1732709-7842198.pdf?src-supplier=Element14, ComponentLink1URL=https://datasheet.ciiva.com/7842/1732709-7842198.pdf?src-supplier=Element14, Construction=Flat, Contact Plating=Tin,Matte, Depth=1.25mm, Dissipation Factor=10%, Height=1.25mm, Length=2mm, Manufacturer Part Number=C0805C106K8PACTU, Mounting Technology="Surface Mount", Packaging="Tape and Reel", Pins=2, Pricing="1=0.141, 25=0.141, 50=0.141, 100=0.141, 250=0.141, 500=0.141, 1000=0.141 (USD)", Radiation Hardening=No, Reach SVHC Compliant=No, RoHS=Yes, RoHS Compliant=Yes, Series=C, Stock=186414, Supplier=Newark, Termination=SMD/SMT, Thickness=0.055inch, Voltage Rating=10V, Voltage Rating (DC)=10V, Width=0.049inch
D300: library part CMP-1667-00003-3, "DIODE SCHOTTKY 40V 3A SMA", Average Rectified Current=3A, Capacitance=250pF, Case/Package=SMA, Forward Voltage=500mV, Manufacturer=Diodes, Max Forward Surge Current (Ifsm)=80A, Max Operating Temperature=125°C, Max Repetitive Reverse Voltage (Vrrm)=40V, Max Reverse Current=500uA, Min Operating Temperature=-55°C, Package Body Material=Plastic, Package Quantity=5000, Package Shape=Rectangular, Package Style="SMALL OUTLINEMeter", Peak Reflow Temperature (Cel)=260°C, Supplier Part Number=B340A-FDICT-ND, Time @ Peak Reflow Temperature-Max (s)=40s, Application(s)=EFFICIENCY, Category="Rectifier Diodes", ComponentLink1Description=https://datasheet.ciiva.com:443/pdfs/VipMasterIC/IC/DIOD/DIOD-S-A0002833665/DIOD-S-A0002833511-1.pdf?src-supplier=IHS+Markit, ComponentLink1URL=https://datasheet.ciiva.com:443/pdfs/VipMasterIC/IC/DIOD/DIOD-S-A0002833665/DIOD-S-A0002833511-1.pdf?src-supplier=IHS+Markit, Contact Plating=Tin, Current=3A, Current Rating=3A, Diode Element Material=SILICON, Diode Type=RECTIFIER, Element Configuration=Single, Forward Current=3A, Height=2.3mm, JESD-30 Code=R-PDSO-C2, JESD-609 Code=e3, Lead Free="Lead Free", Length=4.6mm, Manufacturer Part Number=B340A-13-F, Max Output current=3A, Max Reverse Voltage (DC)=40V, Moisture Sensitivity Level=1, Mount="Surface Mount", Non-rep Pk Forward Current-Max=80A, Number of Elements=1, Number of Phases=1, Number of Pins=2, Output Current=3A, Packaging="Tape and Reel", Peak Non-Repetitive Surge Current=80A, Pins=2, Polarity=Standard, Pricing="1=0.43, 10=0.334, 100=0.2004, 500=0.18558, 1000=0.1262, 2000=0.11618 (USD)", Qualification Status="Not Qualified", Radiation Hardening=No, REACH SVHC="No SVHC", Reach SVHC Compliant=No, Reference Standard=AEC-Q101, Rep Pk Reverse Voltage-Max=40V, RoHS=Yes, RoHS Compliant=Yes, Series=-, Stock=42803, Supplier=Digi-Key, Surface Mount=Yes, Technology=SCHOTTKY, Terminal Finish=Tin, Terminal Form="C BEND", Terminal Position=DUAL, Termination=SMD/SMT, Voltage=40V, Voltage Rating (DC)=40V, Weight=0.002258oz, Width=2.92mm
H200: "Conn Unshrouded Header HDR 4 POS 2.54mm Solder ST Thru-Hole Bag", Manufacturer="Adam Equipment", Manufacturer Part Number=PH1-04-UA, Supplier Part Number 1=2057-PH1-04-UA-ND, Category=Connectors, ComponentLink1Description=http://www.adam-tech.com/catalog/2010/page_292-295.pdf?src-supplier=Future+Electronics, ComponentLink1URL=http://www.adam-tech.com/catalog/2010/page_292-295.pdf?src-supplier=Future+Electronics, ComponentLink2Description=https://datasheet.octopart.com/PH1-04-UA-Adam-Tech-datasheet-12339966.pdf?src-supplier=Future+Electronics, ComponentLink2URL=https://datasheet.octopart.com/PH1-04-UA-Adam-Tech-datasheet-12339966.pdf?src-supplier=Future+Electronics, Lead Free="Lead Free", Number of Positions=4, Pitch=2.54mm, Pricing 1="1=0.1, 10=0.067, 100=0.0498, 500=0.0412, 1000=0.03606, 5000=0.03091, 10000=0.03005 (USD)", RoHS=Yes, Stock 1=21149, Supplier 1=Digi-Key, Termination="Through Hole"
J200 J201 J202 J203 J204: library part CMP-02366-000003-1, "CONN MOD JACK 8P8C R/A UNSHLD", Contact Resistance=20mR, Current Rating=1.5A, Manufacturer=Amphenol, Max Voltage Rating (AC)=125V, Package=CONN_MOD_JACK, Supplier Part Number=28T0105, Temperature="-55°C to +85°C", Temperature Range High=+85°C, Temperature Range Low=-55°C, Automotive=No, Category=Conn, ComponentLink1Description=https://datasheet.ciiva.com/7629/1682821-7629402.pdf?src-supplier=Element14, ComponentLink1URL=https://datasheet.ciiva.com/7629/1682821-7629402.pdf?src-supplier=Element14, ComponentLink2Description=Datasheet, ComponentLink2URL=https://cdn.amphenol-icc.com/media/wysiwyg/files/documentation/datasheet/inputoutput/io-modjack-rjhse.pdf, ComponentLink3Description=https://datasheet.ciiva.com/685/rjhse5080-685586.pdf?src-supplier=Digi-Key, ComponentLink3URL=https://datasheet.ciiva.com/685/rjhse5080-685586.pdf?src-supplier=Digi-Key, ComponentLink4Description=https://datasheet.ciiva.com/1432/1693748-1432448.pdf?src-supplier=Element14, ComponentLink4URL=https://datasheet.ciiva.com/1432/1693748-1432448.pdf?src-supplier=Element14, ComponentLink5Description=https://datasheet.ciiva.com/15171/getdatasheetpartid-643190-15171163.pdf?src-supplier=Verical, ComponentLink5URL=https://datasheet.ciiva.com/15171/getdatasheetpartid-643190-15171163.pdf?src-supplier=Verical, Conn Gender=Female, Conn Orientation="Right Angle", Connector Type=RJ45, Contact Material=Gold,Nickel, Contact Plating=Gold, Depth=14.99mm, Device Class L1=Connectors, Device Class L2="Modular / Ethernet Connectors", Device Class L3=unset, Digikey Description="CONN MOD JACK 8P8C R/A UNSHLD", Footprint Url=https://cdn.amphenol-icc.com/media/wysiwyg/files/drawing/rjhse5080.pdf?__cf_chl_jschl_tk__=e349db0bbbb6188a39347cd5e541b92fa02c9719-1587748343-0-AW7tChdeHzRPLX9gSWj7WrKaXQoY9BsmT9Ek0h-T62M9y3Rs9iypFcOtkzb-6sGYQEjFE-jcoNciDETCOZrh1rYyOesac5SvYLoLwHIsHvF4AKBlx-MXmfZUVk9OTTJLqyQq2qMm0PFRLJpNcK0nrKResqOniRSYixG2sPTmOPraH-ULJFBDL602CHqcI9KKBgTq90Jh1OL2Td4moJ99rFsJRJ1Tk_uoxGe8ublcP_ARu-uLpWcQrBcwOcHDTAwL29DAwVaqcH7ta8Ks7WMlHmVl_pILeEDwT0bE9vu5Pa5S3PtNRF1leuFkgi_FMbUxTDulc5xzbXSfng8srUIV1lWXny5nx1fZJEUa_w97yKjffzBMxiWLWVN-V7-uqAaPbyv_m-wRyw5O25OZNyJOeGU, Gender=Female, Height=0.535inch, Is Female=yes, Lead Free=Yes, Length=15.75mm, Manufacturer Part Number=RJHSE-5080, Max Current Rating=1.5A, Mounting Technology="Through Hole,Panel", Mouser Description="Modular Connectors / Ethernet Connectors R/A RJ45 NONSHIELDED 8 CONT NO LEDS", Number of Contacts=8, Number of Ports=1, Number of Positions=8, Number of Positions Loaded=8, Octopart=https://octopart.com/rjhse-5080-amphenol-45060, Orientation="Right Angle", Packaging=Rail/Tube, Pitch=1.02mm, Pricing="1=0.966, 10=0.854, 25=0.808, 50=0.777, 100=0.748, 250=0.688, 500=0.627, 1000=0.568 (USD)", Radiation Hardening=No, Reach SVHC Compliant=Unknown, RoHS=TRUE, RoHS Compliant=Yes, Stock=8640, Supplier=Newark, Termination=Solder, Voltage Rating=125V, Voltage Rating (DC)=125V
L300: library part CMP-14484-000451-1, "SMD Inductors 68uH ±10% 0.05A 7.8Ω 0805", Case Code (Imperial)=0805, Case Code (Metric)=2012, Current Rating=50mA, DC Resistance (DCR)=6R, Inductance=68uH, Inductor Application="RF INDUCTOR", Inductor Type="GENERAL PURPOSE INDUCTOR", Manufacturer="Taiyo Yuden", Max Operating Temperature=105°C, Min Operating Temperature=-40°C, Package Height=1.25mm, Package Length=2mm, Package Quantity=1, Package Style=SMTMeter, Resistor Type=Wirewound, Self Resonant Frequency=10MHz, Supplier Part Number=587-2450-1-ND, Test Frequency=2.52MHz, Tolerance=10%, Case/Package=0805, Case/Size Code=0805, Category="Fixed Inductors", Channels=1, ComponentLink1Description=https://datasheet.ciiva.com:443/pdfs/VipMasterIC/IC/TAIY/TAIY-S-A0009098652/TAIY-S-A0009098837-1.pdf?src-supplier=IHS+Markit, ComponentLink1URL=https://datasheet.ciiva.com:443/pdfs/VipMasterIC/IC/TAIY/TAIY-S-A0009098652/TAIY-S-A0009098837-1.pdf?src-supplier=IHS+Markit, ComponentLink2Description=https://datasheet.ciiva.com/1039/lb2012t680k-ss-1039309.pdf?src-supplier=Digi-Key, ComponentLink2URL=https://datasheet.ciiva.com/1039/lb2012t680k-ss-1039309.pdf?src-supplier=Digi-Key, ComponentLink3Description=https://datasheet.ciiva.com/26872/getdatasheetpartid-637266-26872144.pdf?src-supplier=Verical, ComponentLink3URL=https://datasheet.ciiva.com/26872/getdatasheetpartid-637266-26872144.pdf?src-supplier=Verical, Construction=Chip, Core Material=Ferrite, DC Current=50mA, Depth=1.45mm, Halogen Free="Halogen Free", Height=1.25mm, Height - Seated (Max)=0.057inch, Inductance-Nom (L)=68uH, JESD-609 Code=e3, Lead Free="Lead Free", Length=0.079inch, Manufacturer Part Number=LB2012T680K, Max Current Rating=50mA, Max DC Current=50mA, Military Standard=Not, Mount="Surface Mount", Number of Pins=2, Package Width=1.25mm, Packaging="Tape and Reel", Pins=2, Pricing="1=0.14, 10=0.125, 25=0.1064, 50=0.094, 100=0.0861, 250=0.07828, 500=0.07358, 1000=0.05636 (USD)", Radiation Hardening=No, Reach SVHC Compliant=Yes, RoHS=Yes, RoHS Compliant=Yes, Series=LB, Shape/Size Description="RECTANGULAR PACKAGE", Shielding=Unshielded, Stock=7601, Supplier=Digi-Key, Surface Mount=Yes, Terminal Finish=Tin, Terminal Placement="Dual Ended", Termination=SMD/SMT, Width=1.25mm
LED300 LED301 LED302: library part CMP-1426-00007-1, "SMD mono-color Chip LED, WL-SMCW, Green", Case Code (Imperial)=0805, Case Code (Metric)=2012, Color=Green, Forward Current=30mA, Forward Voltage=3.2V, Lens Color=Colorless, Manufacturer="Wuerth Elektronik", Manufacturer 1="Wurth Electronics", Max Operating Temperature=85°C, Min Operating Temperature=-40°C, Package Quantity=4000, Supplier Part Number=95W3800, Supplier Part Number 1=732-4983-1-ND, Test Current=20mA, Case/Package=0805, Category=LEDs, ComponentLink1Description="Manufacturer URL", ComponentLink1URL=http://www.we-online.com, ComponentLink2Description=Datasheet, ComponentLink2URL=http://katalog.we-online.com/led/datasheet/150080GS75000.pdf, ComponentLink3Description=https://datasheet.ciiva.com/29563/150080gs75000-29563008.pdf?src-supplier=Digi-Key, ComponentLink3URL=https://datasheet.ciiva.com/29563/150080gs75000-29563008.pdf?src-supplier=Digi-Key, ComponentLink4Description=https://datasheet.ciiva.com/29279/759434-da-01-en-chipled-0805-w-kl-gruen-150080gs75000-29279039.pdf?src-supplier=Conrad, ComponentLink4URL=https://datasheet.ciiva.com/29279/759434-da-01-en-chipled-0805-w-kl-gruen-150080gs75000-29279039.pdf?src-supplier=Conrad, Dominant Wavelength=520nm, Height=0.7mm, Length=2mm, Lens Size=1.25mm, Lens Style=Clear,Rectangular, Lens Transparency=Clear, Luminous Intensity=450mcd, Manufacturer Part Number=150080GS75000, Manufacturer Part Number 1=150080GS75000, Mount="Surface Mount", Mounting Technology="Surface Mount", PackageReference=0805_A, Packaging="Cut Tape", PartNumber=150080GS75000, Pricing="1=0.194, 5=0.194, 10=0.191, 25=0.186, 50=0.18, 100=0.154, 500=0.141 (USD)", Pricing 1="1=0.19000, 50=0.17600, 100=0.15100, 500=0.13100 (USD)", REACH SVHC=Unknown, Reach SVHC Compliant=Unknown, RoHS=Yes, RoHS Compliant=Yes, Series=WL-SMCW, Stock=59977, Stock 1=95801, Supplier=Newark, Supplier 1=Digi-Key, Viewing Angle=140°, Wavelength=520nm, Width=1.25mm
MH1 MH2 MH3 MH4: "Mounting Holde", Manufacturer Part Number="UW MTHOLE"
P200: library part "CONN JACK PWR W/SW", "CONN PWR JACK 2.1X5.5MM HIGH CUR", Color=Black, Current Rating=5A, Manufacturer="CUI Inc", Manufacturer Part Number=PJ-102AH, Operating Temperature="-25°C ~ 85°C", Supplier Part Number=CP-102AH-ND, Voltage - Rated=24VDC, Connector Type=Jack, Contact Material=Copper, Contact Material - Plating=Nickel, Gender=Male, Housing Color=Black, Housing Material=Thermoplastic, Internal Switch(s)="Single Switch, Normally Closed", Mounting Type="Through Hole, Right Angle", Number of Positions/Contacts="2 Conductors, 3 Contacts", Plug/Mating Plug Diameter="2.1mm ID, 5.5mm OD", Shielding=Unshielded, Supplier=Digi-Key, Termination=Solder
Q300: "MOSFET P-CH 20V 6A SOT23F", Case/Package=SOT-23-3, Continuous Drain Current (ID)=6A, Drain to Source Breakdown Voltage=-20V, Drain to Source Resistance=47.4mR, Drain to Source Voltage (Vdss)=20V, Gate to Source Voltage (Vgs)=8V, Input Capacitance=840pF, Manufacturer 1=Toshiba, Max Operating Temperature=150°C, Max Power Dissipation=1W, Min Operating Temperature=-55°C, Package Quantity=3000, Power Dissipation=2W, Supplier Part Number 1=SSM3J328RLFCT-ND, Category=MOSFETs, ComponentLink1Description=https://datasheet.ciiva.com/11158/ssm3j328r-datasheet-en-20140301-11158652.pdf?src-supplier=Avnet, ComponentLink1URL=https://datasheet.ciiva.com/11158/ssm3j328r-datasheet-en-20140301-11158652.pdf?src-supplier=Avnet, ComponentLink2Description=https://datasheet.ciiva.com/24106/ssm3j328r-datasheet-en-20140301-24106699.pdf?src-supplier=Mouser, ComponentLink2URL=https://datasheet.ciiva.com/24106/ssm3j328r-datasheet-en-20140301-24106699.pdf?src-supplier=Mouser, ComponentLink3Description=https://datasheet.ciiva.com/45425/ssm3j328r-datasheet-en-20140301-45425519.pdf?src-supplier=Digi-Key, ComponentLink3URL=https://datasheet.ciiva.com/45425/ssm3j328r-datasheet-en-20140301-45425519.pdf?src-supplier=Digi-Key, ComponentLink4Description=https://datasheet.ciiva.com/45425/ssm3j328r-datasheet-en-20140301-45425813.pdf?src-supplier=Digi-Key, ComponentLink4URL=https://datasheet.ciiva.com/45425/ssm3j328r-datasheet-en-20140301-45425813.pdf?src-supplier=Digi-Key, Element Configuration=Single, Manufacturer Part Number 1=SSM3J328R,LF, Mount="Surface Mount", Number of Channels=1, Number of Elements=1, Number of Pins=3, Packaging="Tape and Reel", Polarity=P-CHANNEL, Pricing 1="1=0.43000, 10=0.32200, 25=0.29040, 100=0.20060, 500=0.13728, 1000=0.10560 (USD)", Radiation Hardening=No, Rds On Max=29.8mR, RoHS=Yes, RoHS Compliant=Yes, Stock 1=476474, Supplier 1=Digi-Key, Turn-Off Delay Time=107ns, Turn-On Delay Time=32ns
R300 R301 R306 R307 R308 R309 R310: library part CMP-1659-00013-4, "Chip Resistor, 10 KOhm, +/- 1%, 0.125 W, -55 to 155 degC, 0805 (2012 Metric), RoHS, Tape and Reel", Case Code (Imperial)=0805, Case Code (Metric)=2012, Manufacturer=Yageo, Max Operating Temperature="155 degC", Max Power Dissipation=125mW, Min Operating Temperature="-55 degC", Package Quantity=5000, Resistance=10kR, Resistance Tolerance=1%, Resistor Type="Thick Film", Supplier Part Number=05M4535, Supplier Part Number 1=311-10.0KCRCT-ND, Temperature Coefficient=100ppm/°C, Voltage Rating="150 V", Case/Package=0805, Category="Chip SMD Resistors", ComponentLink1Description="Manufacturer URL", ComponentLink1URL=http://www.yageo.com/, ComponentLink2Description=Datasheet, ComponentLink2URL=http://www.yageo.com/documents/recent/PYu-RC_Group_51_RoHS_L_04.pdf, ComponentLink3Description=https://datasheet.ciiva.com/11808/0900766b8106beab-11808151.pdf?src-supplier=RSComponents, ComponentLink3URL=https://datasheet.ciiva.com/11808/0900766b8106beab-11808151.pdf?src-supplier=RSComponents, ComponentLink4Description=https://datasheet.ciiva.com/46447/444164-46447563.pdf?src-supplier=Element14, ComponentLink4URL=https://datasheet.ciiva.com/46447/444164-46447563.pdf?src-supplier=Element14, ComponentLink5Description=https://datasheet.ciiva.com/2456/pyu-r-int-thick-7-2456973.pdf?src-supplier=Digi-Key, ComponentLink5URL=https://datasheet.ciiva.com/2456/pyu-r-int-thick-7-2456973.pdf?src-supplier=Digi-Key, ComponentLink6Description=https://datasheet.ciiva.com/2456/pyu-r-int-thick-7-2456974.pdf?src-supplier=Digi-Key, ComponentLink6URL=https://datasheet.ciiva.com/2456/pyu-r-int-thick-7-2456974.pdf?src-supplier=Digi-Key, ComponentLink7Description=https://datasheet.ciiva.com/2456/pyu-r-int-thick-7-2456972.pdf?src-supplier=Digi-Key, ComponentLink7URL=https://datasheet.ciiva.com/2456/pyu-r-int-thick-7-2456972.pdf?src-supplier=Digi-Key, ComponentLink8Description=https://datasheet.ciiva.com/12669/rc0805-12669688.pdf?src-supplier=Mouser, ComponentLink8URL=https://datasheet.ciiva.com/12669/rc0805-12669688.pdf?src-supplier=Mouser, ComponentLink9Description=https://datasheet.ciiva.com/16747/rc0805-16747087.pdf?src-supplier=Future+Electronics, ComponentLink9URL=https://datasheet.ciiva.com/16747/rc0805-16747087.pdf?src-supplier=Future+Electronics, ComponentLink10Description=https://datasheet.ciiva.com/11808/0900766b8106beab-11808151.pdf?src-supplier=Rs, ComponentLink10URL=https://datasheet.ciiva.com/11808/0900766b8106beab-11808151.pdf?src-supplier=Rs, Construction=Rectangular, DatasheetVersion="Rev. 4, 02/2016", Depth=1.25mm, Features="Moisture Resistant", Height="0.5 mm", Lead Free="Lead Free", Length="2 mm", Manufacturer 1=Yageo, Manufacturer Part Number=RC0805FR-0710KL, Manufacturer Part Number 1=RC0805FR-0710KL, Military Standard=Not, Mount="Surface Mount", Mounting Technology="Surface Mount", Number of Terminations=2, PackageDescription="2-Pin Surface Mounted Device, Body 2 x 1.25 mm", PackageReference=0805, Packaging="Tape and Reel", Pins=2, Power Rating=125mW, Pricing="1=0.102, 10=0.035, 25=0.028, 50=0.021, 100=0.014 (USD)", Pricing 1="1=0.10000, 10=0.03800, 100=0.01560, 1000=0.00702, 2500=0.00610 (USD)", REACH SVHC="No SVHC", Reach SVHC Compliant=Unknown, RoHS=Yes, RoHS Compliant=Yes, RoHSCompliant=true, Series=RC, Size Code=0805, Stock=346650, Stock 1=5682818, Supplier=Newark, Supplier 1=Digi-Key, Technology="THICK FILM", Termination=SMD/SMT, Tolerance=1%, Width=0.049inch
R302: library part CMP-2001-03622-2, "RES Thick Film, 1.78kΩ, 1%, 0.125W, 100ppm/°C, 0805", Case Code (Imperial)=0805, Case Code (Metric)=2012, Manufacturer=Vishay, Max Operating Temperature=155°C, Max Power Dissipation=125mW, Min Operating Temperature=-55°C, Package Height=0.45mm, Package Length=2mm, Package Quantity=10, Package Shape=Rectangular, Package Style=SMTMeter, Package Width=1.25mm, Rated Temperature=70°C, Resistance=1.78kR, Resistor Type="FIXED RESISTOR", Supplier Part Number=541-1.78KCCT-ND, Temperature Coefficient=100ppm/°C, Tolerance=1%, Voltage Rating=150V, Case/Package=0805, Category="Chip SMD Resistors", ComponentLink1Description=https://datasheet.ciiva.com:443/pdfs/VipMasterIC/IC/VISH/VISH-S-A0007266705/VISH-S-A0007266705-1.pdf?src-supplier=IHS+Markit, ComponentLink1URL=https://datasheet.ciiva.com:443/pdfs/VipMasterIC/IC/VISH/VISH-S-A0007266705/VISH-S-A0007266705-1.pdf?src-supplier=IHS+Markit, ComponentLink2Description=https://datasheet.ciiva.com/11810/0900766b80d98b26-11810169.pdf?src-supplier=Rs, ComponentLink2URL=https://datasheet.ciiva.com/11810/0900766b80d98b26-11810169.pdf?src-supplier=Rs, ComponentLink3Description=https://datasheet.ciiva.com/2496/dcrcwe3-2496177.pdf?src-supplier=Digi-Key, ComponentLink3URL=https://datasheet.ciiva.com/2496/dcrcwe3-2496177.pdf?src-supplier=Digi-Key, ComponentLink4Description=https://datasheet.ciiva.com/2496/dcrcwe3-2496175.pdf?src-supplier=Digi-Key, ComponentLink4URL=https://datasheet.ciiva.com/2496/dcrcwe3-2496175.pdf?src-supplier=Digi-Key, ComponentLink5Description=https://datasheet.ciiva.com/3258/dcrcwe3-3258267.pdf?src-supplier=Avnet, ComponentLink5URL=https://datasheet.ciiva.com/3258/dcrcwe3-3258267.pdf?src-supplier=Avnet, ComponentLink6Description=https://datasheet.ciiva.com/3258/dcrcwe3-3258268.pdf?src-supplier=Avnet, ComponentLink6URL=https://datasheet.ciiva.com/3258/dcrcwe3-3258268.pdf?src-supplier=Avnet, ComponentLink7Description=https://datasheet.ciiva.com/16395/dcrcwe3-16395386.pdf?src-supplier=Future+Electronics, ComponentLink7URL=https://datasheet.ciiva.com/16395/dcrcwe3-16395386.pdf?src-supplier=Future+Electronics, ComponentLink8Description=https://datasheet.ciiva.com/16774/70201119-16774782.pdf?src-supplier=Allied+Electronics, ComponentLink8URL=https://datasheet.ciiva.com/16774/70201119-16774782.pdf?src-supplier=Allied+Electronics, ComponentLink9Description=https://datasheet.ciiva.com/22702/1697337-22702743.pdf?src-supplier=Element14, ComponentLink9URL=https://datasheet.ciiva.com/22702/1697337-22702743.pdf?src-supplier=Element14, ComponentLink10Description=https://datasheet.ciiva.com/22675/1847332-22675193.pdf?src-supplier=Element14, ComponentLink10URL=https://datasheet.ciiva.com/22675/1847332-22675193.pdf?src-supplier=Element14, ComponentLink11Description=https://datasheet.ciiva.com/5541/dcrcwe3-109170-5541990.pdf?src-supplier=Mouser, ComponentLink11URL=https://datasheet.ciiva.com/5541/dcrcwe3-109170-5541990.pdf?src-supplier=Mouser, ComponentLink12Description=https://datasheet.ciiva.com/2496/dcrcwe3-2496176.pdf?src-supplier=Digi-Key, ComponentLink12URL=https://datasheet.ciiva.com/2496/dcrcwe3-2496176.pdf?src-supplier=Digi-Key, Composition="Thick Film", Construction=Chip, Contact Plating=Tin, Depth=1.25mm, Features="Automotive AEC-Q200", Height=0.45mm, JESD-609 Code=e3, Lead Free="Lead Free", Length=2mm, Manufacturer Part Number=CRCW08051K78FKEA, Military Standard=Not, Mounting Technology="Surface Mount", Number of Pins=2, Number of Terminations=2, Packaging="Tape and Reel", Pins=2, Power=125mW, Power Rating=125mW, Pricing="1=0.1, 10=0.038, 50=0.0244, 100=0.0206, 500=0.01434, 1000=0.01248 (USD)", Radiation Hardening=No, Reach SVHC Compliant=Yes, Reference Standard=AEC-Q200, RoHS=Yes, RoHS Compliant=Yes, Stock=14356, Supplier=Digi-Key, Technology="METAL GLAZE/THICK FILM", Terminal Finish=Nickel, Termination=SMD/SMT, Voltage Rating (DC)=150V, Weight=0.000194oz, Width=0.049inch, Working Voltage=150V